# EAGLE board led4pins_nonpanel (EAGLE 6.3)
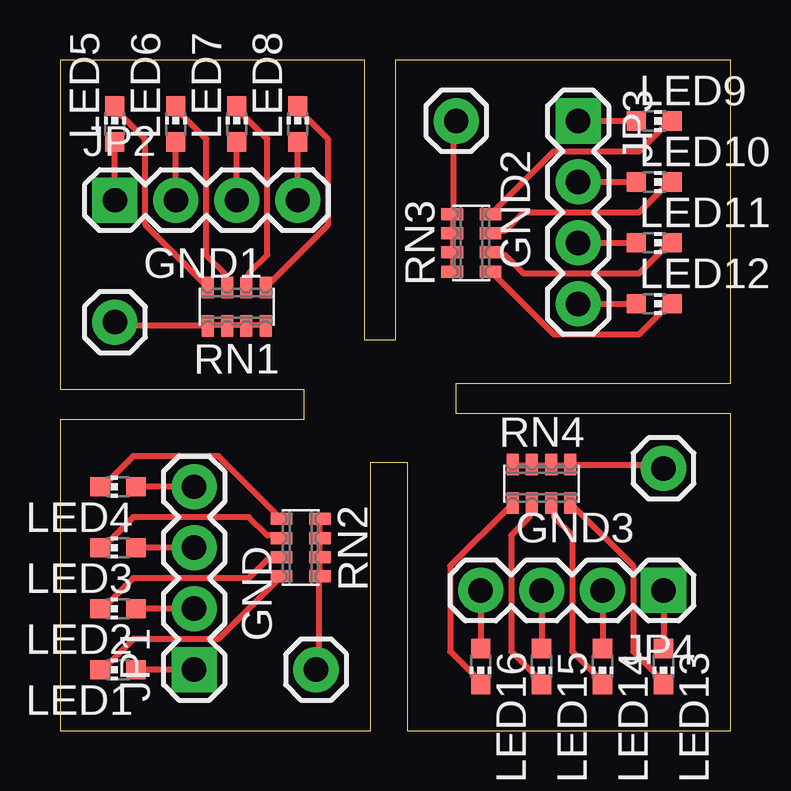
[diagram p0: board, top side]

Size 27.94 x 27.94 mm. Coordinates in mm from the lower left corner, seen from the top.
Outline: 0,0 12.95,0 12.95,11.18 14.48,11.18 14.48,0 27.94,0 27.94,13.21 16.51,13.21 16.51,14.48 27.94,14.48 27.94,27.94 13.97,27.94 13.97,16.26 12.7,16.26 12.7,27.94 0,27.94 0,14.22 10.16,14.22 10.16,12.95 0,12.95 0,0
Copper layers (1*16): Top 0.035mm / dielectric 1.5mm / Bottom 0.035mm
Design rules "default": minimum track width 10mil, minimum drill 24mil, track to track 8mil, track to pad 8mil, pad to pad 8mil, via to via 8mil, smd to smd 8mil, copper to edge 40mil, drill to drill 8mil, minimum pad ring 10mil, minimum via ring 8mil, stop-mask expansion 4mil, vias tented up to drill 0mil, thermal gap 10mil

## Footprints (pad centres in the part's own frame; a part is rotated, then mirrored left to right if it is on the bottom)
1X01 = drill 1.016 pad 1.88: 1 0,0
1X04 = drill 1.016 pad 1.88 square: 1 0,0 | drill 1.016 pad 1.88: 2 2.54,0; 3 5.08,0; 4 7.62,0
CHIP-LED0603 = smd 0.8 x 0.8: A 0,-0.75; C 0,0.75
CTS742C083 = smd 0.5 x 0.9: 1 -1.2,-0.8; 2 -0.4,-0.8; 3 0.4,-0.8; 4 1.2,-0.8; 5 1.2,0.8; 6 0.4,0.8; 7 -0.4,0.8; 8 -1.2,0.8

## Placement (x,y rotation side)
GND  M01PTH  [1X01]  10.67,2.54 90 top
GND1  M01PTH  [1X01]  2.29,17.02 0 top
GND2  M01PTH  [1X01]  16.51,25.4 270 top
GND3  M01PTH  [1X01]  25.15,10.92 180 top
JP1  [1X04]  5.59,2.54 90 top
JP2  [1X04]  2.29,22.1 0 top
JP3  [1X04]  21.59,25.4 270 top
JP4  [1X04]  25.15,5.84 180 top
LED1  [CHIP-LED0603]  2.41,2.54 90 top
LED2  [CHIP-LED0603]  2.41,5.08 90 top
LED3  [CHIP-LED0603]  2.41,7.62 90 top
LED4  [CHIP-LED0603]  2.41,10.16 90 top
LED5  [CHIP-LED0603]  2.29,25.27 0 top
LED6  [CHIP-LED0603]  4.83,25.27 0 top
LED7  [CHIP-LED0603]  7.37,25.27 0 top
LED8  [CHIP-LED0603]  9.91,25.27 0 top
LED9  [CHIP-LED0603]  24.77,25.4 270 top
LED10  [CHIP-LED0603]  24.77,22.86 270 top
LED11  [CHIP-LED0603]  24.77,20.32 270 top
LED12  [CHIP-LED0603]  24.77,17.78 270 top
LED13  [CHIP-LED0603]  25.15,2.67 180 top
LED14  [CHIP-LED0603]  22.61,2.67 180 top
LED15  [CHIP-LED0603]  20.07,2.67 180 top
LED16  [CHIP-LED0603]  17.53,2.67 180 top
RN1  CTS742C083  [CTS742C083]  7.37,17.65 180 top
RN2  CTS742C083  [CTS742C083]  10.03,7.62 270 top
RN3  CTS742C083  [CTS742C083]  17.14,20.32 90 top
RN4  CTS742C083  [CTS742C083]  20.07,10.29 0 top

## Library data of the parts
GND GND1-GND3 JP1-JP4 = SparkFun-Connectors
LED1-LED16 = adafruit
RN1-RN4 = resistor-net; OC_FARNELL: unknown; OC_NEWARK: unknown

## Nets
N$1: JP1.1 LED1.A
N$2: JP1.2 LED2.A
N$3: JP1.3 LED3.A
N$4: JP1.4 LED4.A
N$7: JP2.1 LED5.A
N$8: JP2.2 LED6.A
N$9: LED1.C RN2.4
N$10: LED2.C RN2.3
N$11: LED3.C RN2.2
N$12: LED4.C RN2.1
N$13: JP2.3 LED7.A
N$14: JP2.4 LED8.A
N$15: LED5.C RN1.4
N$16: LED6.C RN1.3
N$17: GND.1 RN2.5 RN2.6 RN2.7 RN2.8
N$18: LED7.C RN1.2
N$19: LED8.C RN1.1
N$20: GND1.1 RN1.5 RN1.6 RN1.7 RN1.8
N$21: JP3.1 LED9.A
N$22: JP3.2 LED10.A
N$23: JP3.3 LED11.A
N$24: JP3.4 LED12.A
N$25: LED9.C RN3.4
N$26: LED10.C RN3.3
N$27: LED11.C RN3.2
N$28: LED12.C RN3.1
N$29: GND2.1 RN3.5 RN3.6 RN3.7 RN3.8
N$30: JP4.1 LED13.A
N$31: JP4.2 LED14.A
N$32: JP4.3 LED15.A
N$33: JP4.4 LED16.A
N$34: LED13.C RN4.4
N$35: LED14.C RN4.3
N$36: LED15.C RN4.2
N$37: LED16.C RN4.1
N$38: GND3.1 RN4.5 RN4.6 RN4.7 RN4.8

## Tracks (layer width: path | path; a pad name or v marks a point on that pad's centre or on a via)
N$1
  Top 0.254: JP1.1 LED1.A
N$2
  Top 0.254: JP1.2 LED2.A
N$3
  Top 0.254: JP1.3 LED3.A
N$4
  Top 0.254: JP1.4 LED4.A
N$7
  Top 0.254: JP2.1 LED5.A
N$8
  Top 0.254: JP2.2 LED6.A
N$9
  Top 0.254: LED1.C 1.78,2.54 3.05,3.81 6.6,3.81 9.14,6.35 RN2.4
N$10
  Top 0.254: LED2.C 1.78,5.08 3.05,6.35 7.87,6.35 8.64,7.11 9.14,7.11 RN2.3
N$11
  Top 0.254: LED3.C 1.78,7.62 3.05,8.89 7.87,8.89 8.64,8.13 9.14,8.13 RN2.2
N$12
  Top 0.254: LED4.C 1.78,10.16 3.05,11.43 6.6,11.43 9.14,8.89 RN2.1
N$13
  Top 0.254: JP2.3 LED7.A
N$14
  Top 0.254: JP2.4 LED8.A
N$15
  Top 0.254: LED5.C 2.29,25.91 3.56,24.64 3.56,21.08 6.1,18.54 RN1.4
N$16
  Top 0.254: LED6.C 4.83,25.91 6.1,24.64 6.1,19.81 6.86,19.05 6.86,18.54 RN1.3
N$17
  Top 0.254: RN2.8 10.79,8.76 10.79,8.13 RN2.7 10.79,8 10.79,7.24 RN2.6 10.79,7.11 10.79,6.48 RN2.5 10.79,6.35 10.79,2.67 GND.1
N$18
  Top 0.254: LED7.C 7.37,25.91 8.64,24.64 8.64,19.81 7.87,19.05 7.87,18.54 RN1.2
N$19
  Top 0.254: LED8.C 9.91,25.91 11.18,24.64 11.18,21.08 8.64,18.54 RN1.1
N$20
  Top 0.254: RN1.8 8.51,16.89 7.87,16.89 RN1.7 7.75,16.89 6.99,16.89 RN1.6 6.86,16.89 6.22,16.89 RN1.5 6.1,16.89 2.41,16.89 GND1.1
N$21
  Top 0.254: JP3.1 LED9.A
N$22
  Top 0.254: JP3.2 LED10.A
N$23
  Top 0.254: JP3.3 LED11.A
N$24
  Top 0.254: JP3.4 LED12.A
N$25
  Top 0.254: LED9.C 25.4,25.4 24.13,24.13 20.57,24.13 18.03,21.59 RN3.4
N$26
  Top 0.254: LED10.C 25.4,22.86 24.13,21.59 19.3,21.59 18.54,20.83 18.03,20.83 RN3.3
N$27
  Top 0.254: LED11.C 25.4,20.32 24.13,19.05 19.3,19.05 18.54,19.81 18.03,19.81 RN3.2
N$28
  Top 0.254: LED12.C 25.4,17.78 24.13,16.51 20.57,16.51 18.03,19.05 RN3.1
N$29
  Top 0.254: RN3.8 16.38,19.18 16.38,19.81 RN3.7 16.38,19.94 16.38,20.7 RN3.6 16.38,20.83 16.38,21.46 RN3.5 16.38,21.59 16.38,25.27 GND2.1
N$30
  Top 0.254: JP4.1 LED13.A
N$31
  Top 0.254: JP4.2 LED14.A
N$32
  Top 0.254: JP4.3 LED15.A
N$33
  Top 0.254: JP4.4 LED16.A
N$34
  Top 0.254: LED13.C 25.15,2.03 23.88,3.3 23.88,6.86 21.34,9.4 RN4.4
N$35
  Top 0.254: LED14.C 22.61,2.03 21.34,3.3 21.34,8.13 20.57,8.89 20.57,9.4 RN4.3
N$36
  Top 0.254: LED15.C 20.07,2.03 18.8,3.3 18.8,8.13 19.56,8.89 19.56,9.4 RN4.2
N$37
  Top 0.254: LED16.C 17.53,2.03 16.26,3.3 16.26,6.86 18.8,9.4 RN4.1
N$38
  Top 0.254: RN4.8 18.92,11.05 19.56,11.05 RN4.7 19.68,11.05 20.45,11.05 RN4.6 20.57,11.05 21.21,11.05 RN4.5 21.34,11.05 25.02,11.05 GND3.1

## Text on the board
_tNames: RN2 | RN2 | GND | GND | JP1 | JP1 | LED4 | LED3 | LED2 | LED1 | LED4 | LED3 | LED2 | LED1 | LED1 | LED2 | LED3 | LED4 | LED1 | LED2 | LED3 | LED4 | JP1 | JP1 | GND | GND | RN2 | RN2